# EAGLE board CT_schematic (EAGLE 7.6.0)

Size 100 x 80 mm. Coordinates in mm from the lower left corner, seen from the top.
Outline: 0,0 100,0 100,80 0,80 0,0
Copper layers (1*16): Top 0.035mm / dielectric 1.5mm / Bottom 0.035mm
Design rules "default": minimum track width 10mil, minimum drill 24mil, track to track 8mil, track to pad 8mil, pad to pad 8mil, via to via 8mil, smd to smd 8mil, copper to edge 40mil, drill to drill 8mil, minimum pad ring 10mil, minimum via ring 8mil, stop-mask expansion 4mil, vias tented up to drill 0mil, thermal gap 10mil

## Footprints (pad centres in the part's own frame; a part is rotated, then mirrored left to right if it is on the bottom)
C0603 = smd 0.8 x 0.8: 1 -0.762,0; 2 0.762,0
C0402 = smd 0.5 x 0.5: 1 -0.508,0; 2 0.508,0
C0805 = smd 1.2 x 1.3: 1 -1.016,0; 2 1.016,0
R0603 = smd 0.8 x 0.8: 1 -0.762,0; 2 0.762,0
C1210 = smd 1.2 x 2.5: 1 -1.524,0; 2 1.524,0
EXV-9H = smd 3.505 x 1.676: 1 -2.857,0; 2 2.857,0
L0603 = smd 0.8 x 0.8: 1 -0.762,0; 2 0.762,0
L1210 = smd 1.2 x 2.5: 1 -1.524,0; 2 1.524,0
PJ-037B_PACKAGE = drill 3.7 square: 1 12,0 | drill 3.2 square: 2 6,0
LQFP176 = smd 0.3 x 1.2: 1 -10.75,-12.75; 2 -10.25,-12.75; 3 -9.75,-12.75; 4 -9.25,-12.75; 5 -8.75,-12.75; 6 -8.25,-12.75; 7 -7.75,-12.75; 8 -7.25,-12.75; 9 -6.75,-12.75; 10 -6.25,-12.75; 11 -5.75,-12.75; 12 -5.25,-12.75; 13 -4.75,-12.75; 14 -4.25,-12.75; 15 -3.75,-12.75; 16 -3.25,-12.75; 17 -2.75,-12.75; 18 -2.25,-12.75; 19 -1.75,-12.75; 20 -1.25,-12.75; 21 -0.75,-12.75; 22 -0.25,-12.75; 23 0.25,-12.75; 24 0.75,-12.75; 25 1.25,-12.75; 26 1.75,-12.75; 27 2.25,-12.75; 28 2.75,-12.75; 29 3.25,-12.75; 30 3.75,-12.75; 31 4.25,-12.75; 32 4.75,-12.75; 33 5.25,-12.75; 34 5.75,-12.75; 35 6.25,-12.75; 36 6.75,-12.75; 37 7.25,-12.75; 38 7.75,-12.75; 39 8.25,-12.75; 40 8.75,-12.75; 41 9.25,-12.75; 42 9.75,-12.75; 43 10.25,-12.75; 44 10.75,-12.75; 89 10.75,12.75; 90 10.25,12.75; 91 9.75,12.75; 92 9.25,12.75; 93 8.75,12.75; 94 8.25,12.75; 95 7.75,12.75; 96 7.25,12.75; 97 6.75,12.75; 98 6.25,12.75; 99 5.75,12.75; 100 5.25,12.75; 101 4.75,12.75; 102 4.25,12.75; 103 3.75,12.75; 104 3.25,12.75; 105 2.75,12.75; 106 2.25,12.75; 107 1.75,12.75; 108 1.25,12.75; 109 0.75,12.75; 110 0.25,12.75; 111 -0.25,12.75; 112 -0.75,12.75; 113 -1.25,12.75; 114 -1.75,12.75; 115 -2.25,12.75; 116 -2.75,12.75; 117 -3.25,12.75; 118 -3.75,12.75; 119 -4.25,12.75; 120 -4.75,12.75; 121 -5.25,12.75; 122 -5.75,12.75; 123 -6.25,12.75; 124 -6.75,12.75; 125 -7.25,12.75; 126 -7.75,12.75; 127 -8.25,12.75; 128 -8.75,12.75; 129 -9.25,12.75; 130 -9.75,12.75; 131 -10.25,12.75; 132 -10.75,12.75 | smd 1.2 x 0.3: 45 12.75,-10.75; 46 12.75,-10.25; 47 12.75,-9.75; 48 12.75,-9.25; 49 12.75,-8.75; 50 12.75,-8.25; 51 12.75,-7.75; 52 12.75,-7.25; 53 12.75,-6.75; 54 12.75,-6.25; 55 12.75,-5.75; 56 12.75,-5.25; 57 12.75,-4.75; 58 12.75,-4.25; 59 12.75,-3.75; 60 12.75,-3.25; 61 12.75,-2.75; 62 12.75,-2.25; 63 12.75,-1.75; 64 12.75,-1.25; 65 12.75,-0.75; 66 12.75,-0.25; 67 12.75,0.25; 68 12.75,0.75; 69 12.75,1.25; 70 12.75,1.75; 71 12.75,2.25; 72 12.75,2.75; 73 12.75,3.25; 74 12.75,3.75; 75 12.75,4.25; 76 12.75,4.75; 77 12.75,5.25; 78 12.75,5.75; 79 12.75,6.25; 80 12.75,6.75; 81 12.75,7.25; 82 12.75,7.75; 83 12.75,8.25; 84 12.75,8.75; 85 12.75,9.25; 86 12.75,9.75; 87 12.75,10.25; 88 12.75,10.75; 133 -12.75,10.75; 134 -12.75,10.25; 135 -12.75,9.75; 136 -12.75,9.25; 137 -12.75,8.75; 138 -12.75,8.25; 139 -12.75,7.75; 140 -12.75,7.25; 141 -12.75,6.75; 142 -12.75,6.25; 143 -12.75,5.75; 144 -12.75,5.25; 145 -12.75,4.75; 146 -12.75,4.25; 147 -12.75,3.75; 148 -12.75,3.25; 149 -12.75,2.75; 150 -12.75,2.25; 151 -12.75,1.75; 152 -12.75,1.25; 153 -12.75,0.75; 154 -12.75,0.25; 155 -12.75,-0.25; 156 -12.75,-0.75; 157 -12.75,-1.25; 158 -12.75,-1.75; 159 -12.75,-2.25; 160 -12.75,-2.75; 161 -12.75,-3.25; 162 -12.75,-3.75; 163 -12.75,-4.25; 164 -12.75,-4.75; 165 -12.75,-5.25; 166 -12.75,-5.75; 167 -12.75,-6.25; 168 -12.75,-6.75; 169 -12.75,-7.25; 170 -12.75,-7.75; 171 -12.75,-8.25; 172 -12.75,-8.75; 173 -12.75,-9.25; 174 -12.75,-9.75; 175 -12.75,-10.25; 176 -12.75,-10.75
LGA14R35P5X6_200X200X100 = smd 0.35 x 0.15: 1 -0.8,0.525; 2 -0.8,0.175; 3 -0.8,-0.175; 4 -0.8,-0.525; 8 0.8,-0.525; 9 0.8,-0.175; 10 0.8,0.175; 11 0.8,0.525 | smd 0.15 x 0.35: 5 -0.35,-0.8; 6 0,-0.8; 7 0.35,-0.8; 12 0.35,0.8; 13 0,0.8; 14 -0.35,0.8
TST-110-05-T-D-RA = drill 1 pad 1.7 square: 1 0,0 | drill 1 pad 1.7: 2 0,2.54; 3 2.54,0; 4 2.54,2.54; 5 5.08,0; 6 5.08,2.54; 7 7.62,0; 8 7.62,2.54; 9 10.16,0; 10 10.16,2.54; 11 12.7,0; 12 12.7,2.54; 13 15.24,0; 14 15.24,2.54; 15 17.78,0; 16 17.78,2.54; 17 20.32,0; 18 20.32,2.54; 19 22.86,0; 20 22.86,2.54
SSOP-20 = smd 1.651 x 0.432: 1 -3.48,2.925; 2 -3.48,2.275; 3 -3.48,1.625; 4 -3.48,0.975; 5 -3.48,0.325; 6 -3.48,-0.325; 7 -3.48,-0.975; 8 -3.48,-1.625; 9 -3.48,-2.275; 10 -3.48,-2.925; 11 3.48,-2.925; 12 3.48,-2.275; 13 3.48,-1.625; 14 3.48,-0.975; 15 3.48,-0.325; 16 3.48,0.325; 17 3.48,0.975; 18 3.48,1.625; 19 3.48,2.275; 20 3.48,2.925
HTSS-105-01-G-D = drill 1 pad 1.8 square: 1 0,0 | drill 1 pad 1.8: 2 0,2.54; 3 2.54,0; 4 2.54,2.54; 5 5.08,0; 6 5.08,2.54; 7 7.62,0; 8 7.62,2.54; 9 10.16,0; 10 10.16,2.54
TDFN-8/6MM = smd 0.3 x 0.75: 1 0,0; 2 0.5,0; 3 1,0; 4 1.5,0; 5 1.5,3; 6 1,3; 7 0.5,3; 8 0,3
PC28F512P33BFD = smd 0.45 x 0.45: A1 0,0; A2 1,0; A3 2,0; A4 3,0; A5 4,0; A6 5,0; A7 6,0; A8 7,0; B1 0,-1; B2 1,-1; B3 2,-1; B4 3,-1; B5 4,-1; B6 5,-1; B7 6,-1; B8 7,-1; C1 0,-2; C2 1,-2; C3 2,-2; C4 3,-2; C5 4,-2; C6 5,-2; C7 6,-2; C8 7,-2; D1 0,-3; D2 1,-3; D3 2,-3; D4 3,-3; D5 4,-3; D6 5,-3; D7 6,-3; D8 7,-3; E1 0,-4; E2 1,-4; E3 2,-4; E4 3,-4; E5 4,-4; E6 5,-4; E7 6,-4; E8 7,-4; F1 0,-5; F2 1,-5; F3 2,-5; F4 3,-5; F5 4,-5; F6 5,-5; F7 6,-5; F8 7,-5; G1 0,-6; G2 1,-6; G3 2,-6; G4 3,-6; G5 4,-6; G6 5,-6; G7 6,-6; G8 7,-6; H1 0,-7; H2 1,-7; H3 2,-7; H4 3,-7; H5 4,-7; H6 5,-7; H7 6,-7; H8 7,-7
QFN-24 = smd 0.7 x 0.305: 1 -1.815,1.25; 2 -1.815,0.75; 3 -1.815,0.25; 4 -1.815,-0.25; 5 -1.815,-0.73; 6 -1.815,-1.25; 13 1.815,-1.25; 14 1.815,-0.75; 15 1.815,-0.25; 16 1.815,0.25; 17 1.815,0.75; 18 1.815,1.25 | smd 0.305 x 0.7: 7 -1.25,-1.815; 8 -0.75,-1.815; 9 -0.25,-1.815; 10 0.25,-1.815; 11 0.75,-1.815; 12 1.25,-1.815; 19 1.25,1.815; 20 0.75,1.815; 21 0.25,1.815; 22 -0.25,1.815; 23 -0.75,1.815; 24 -1.25,1.815 | smd 2.591 x 2.591: 25 0,0
USB-A-H = drill 0.914: 1 2.718,3.493; 2 2.718,1.003; 3 2.718,-1.003; 4 2.718,-3.493 | drill 2.311: 5 0,-6.566; 6 0,6.566
SOT143B = smd 1 x 0.7: 1 -0.75,-1 | smd 0.6 x 0.7: 2 0.95,-1; 3 0.95,1; 4 -0.95,1
SOT-23-6 = smd 1.1 x 0.6: 1 -1.4,0.95; 2 -1.4,0; 3 -1.4,-0.95; 4 1.4,-0.95; 5 1.4,0; 6 1.4,0.95
ABS07-32.768KHZ-7-T = smd 1.1 x 2.4: 1 -2.5,0; 2 0,0
ABLS-25.000MHZ-B2F-T = smd 5.6 x 2.8: 1 -3.81,0; 2 5.69,0
ASFL1 = smd 1.7 x 1.5: 1 -1.27,-1.1; 2 1.27,-1.1; 3 1.27,1.1; 4 -1.27,1.1
WSON-8 = smd 0.3 x 0.6: 1 -0.75,0; 2 0.05,0; 3 0.85,0; 4 1.65,0; 5 1.65,3.8; 6 0.85,3.8; 7 0.05,3.8; 8 -0.75,3.8 | smd 3 x 2.6: PAD 0.45,1.9
SON-6 = smd 0.55 x 0.3: 1 -0.355,0.5 | smd 0.52 x 0.3: 2 -0.37,0; 3 -0.37,-0.5; 4 0.37,-0.5; 5 0.37,0; 6 0.37,0.5
SW_4-1437565-2 = smd 1.4 x 2.1: 1 -2.23,4.55; 2 -2.23,-4.55; 3 2.23,4.55; 4 2.23,-4.55
LGM67K-G1J2-24-Z = smd 0.8 x 1.4: A -2,0; C 0,0
NC7SZ125M5X = smd 1.3 x 0.7: 1 -1.3,0.95; 2 -1.3,0; 3 -1.3,-0.95; 4 1.3,-0.95; 5 1.3,0.95

## Placement (x,y rotation side)
C1  1e-06  [C0603]  -49.53,78.74 0 top  (outside the outline)
C2  1e-07  [C0603]  -53.34,78.74 0 top  (outside the outline)
C3  1e-07  [C0603]  -57.15,78.74 0 top  (outside the outline)
C4  1e-07  [C0603]  -60.96,78.74 0 top  (outside the outline)
C5  1e-07  [C0603]  -64.77,78.74 0 top  (outside the outline)
C6  1e-07  [C0603]  -68.58,78.74 0 top  (outside the outline)
C7  1e-07  [C0603]  -72.39,78.74 0 top  (outside the outline)
C8  1e-07  [C0603]  -76.2,78.74 0 top  (outside the outline)
C9  1e-07  [C0603]  -80.01,78.74 0 top  (outside the outline)
C10  1e-07  [C0603]  -83.82,78.74 0 top  (outside the outline)
C11  1e-07  [C0603]  -87.63,78.74 0 top  (outside the outline)
C12  1e-07  [C0603]  -15.24,83.82 0 top  (outside the outline)
C13  1e-07  [C0603]  -19.05,83.82 0 top  (outside the outline)
C14  1e-07  [C0603]  -22.86,83.82 0 top  (outside the outline)
C15  1e-07  [C0603]  -26.67,83.82 0 top  (outside the outline)
C16  1e-07  [C0603]  -30.48,83.82 0 top  (outside the outline)
C17  1e-07  [C0603]  -34.29,83.82 0 top  (outside the outline)
C18  4.7e-06  [C0603]  -34.29,78.74 0 top  (outside the outline)
C19  2.2e-06  [C0603]  -38.1,78.74 0 top  (outside the outline)
C20  2.2e-06  [C0603]  -41.91,78.74 0 top  (outside the outline)
C21  1e-08  [C0603]  -38.1,83.82 0 top  (outside the outline)
C22  1e-06  [C0603]  -41.91,83.82 0 top  (outside the outline)
C23  1e-11  [C0402]  -45.72,88.9 0 top  (outside the outline)
C24  1e-11  [C0402]  -49.53,88.9 0 top  (outside the outline)
C25  1e-11  [C0402]  -53.34,88.9 0 top  (outside the outline)
C26  1e-11  [C0402]  -57.15,88.9 0 top  (outside the outline)
C27  1e-07  [C0402]  -60.96,88.9 0 top  (outside the outline)
C28  1e-07  [C0402]  -64.77,88.9 0 top  (outside the outline)
C29  1e-07  [C0402]  -68.58,88.9 0 top  (outside the outline)
C30  1e-06  [C0603]  -45.72,83.82 0 top  (outside the outline)
C31  1e-06  [C0603]  -49.53,83.82 0 top  (outside the outline)
C32  1e-06  [C0603]  -53.34,83.82 0 top  (outside the outline)
C33  4.7e-06  [C0805]  -72.39,67.31 0 top  (outside the outline)
C34  1e-08  [C0402]  -72.39,88.9 0 top  (outside the outline)
C35  1e-07  [C0402]  -76.2,88.9 0 top  (outside the outline)
C36  1e-08  [C0402]  -80.01,88.9 0 top  (outside the outline)
C37  1e-07  [C0402]  -83.82,88.9 0 top  (outside the outline)
C38  1e-08  [C0402]  -87.63,88.9 0 top  (outside the outline)
C39  1e-07  [C0402]  -15.24,93.98 0 top  (outside the outline)
C40  1e-08  [C0402]  -19.05,93.98 0 top  (outside the outline)
C41  1e-08  [C0402]  -22.86,93.98 0 top  (outside the outline)
C42  2.2e-06  [C0603]  -45.72,78.74 0 top  (outside the outline)
C43  1e-08  [C0402]  -26.67,93.98 0 top  (outside the outline)
C44  1e-08  [C0402]  -30.48,93.98 0 top  (outside the outline)
C45  0.0001  [R0603]  -57.15,83.82 0 top  (outside the outline)
C46  1e-08  [C0402]  -34.29,93.98 0 top  (outside the outline)
C47  8e-07  [R0603]  -60.96,83.82 0 top  (outside the outline)
C48  1e-05  [C0805]  -77.47,67.31 0 top  (outside the outline)
C49  1e-08  [C0402]  -38.1,93.98 0 top  (outside the outline)
C50  1e-05  [C1210]  -86.36,60.96 0 top  (outside the outline)
C51  1e-05  [C1210]  -16.51,67.31 0 top  (outside the outline)
C52  1e-08  [C0402]  -41.91,93.98 0 top  (outside the outline)
C53  1e-05  [C1210]  -22.86,67.31 0 top  (outside the outline)
C54  1e-05  [C1210]  -29.21,67.31 0 top  (outside the outline)
C55  1e-07  [C0402]  -45.72,93.98 0 top  (outside the outline)
C56  0.0001  [EXV-9H]  -54.61,53.34 0 top  (outside the outline)
C57  0.0001  [EXV-9H]  -66.04,53.34 0 top  (outside the outline)
C58  1e-08  [C0402]  -49.53,93.98 0 top  (outside the outline)
C59  1e-08  [C0402]  -53.34,93.98 0 top  (outside the outline)
C60  1e-08  [C0402]  -57.15,93.98 0 top  (outside the outline)
C61  1e-08  [C0402]  -60.96,93.98 0 top  (outside the outline)
F1  240.0  [L0603]  -64.77,83.82 0 top  (outside the outline)
I1  1.5e-05  [L1210]  -35.56,67.31 0 top  (outside the outline)
J1  PJ-037B  [PJ-037B_PACKAGE]  -72.39,7.62 0 top  (outside the outline)
R2  1000.0  [R0603]  -68.58,83.82 0 top  (outside the outline)
R4  4700.0  [R0603]  -72.39,83.82 0 top  (outside the outline)
R5  4700.0  [R0603]  -76.2,83.82 0 top  (outside the outline)
R6  4700.0  [R0603]  -80.01,83.82 0 top  (outside the outline)
R7  2200.0  [R0603]  -83.82,83.82 0 top  (outside the outline)
R8  2200.0  [R0603]  -87.63,83.82 0 top  (outside the outline)
R9  2200.0  [R0603]  -15.24,88.9 0 top  (outside the outline)
R10  2200.0  [R0603]  -19.05,88.9 0 top  (outside the outline)
R11  10000.0  [R0603]  -50.8,73.66 0 top  (outside the outline)
R12  10000.0  [R0603]  -55.88,73.66 0 top  (outside the outline)
R13  10000.0  [R0603]  -60.96,73.66 0 top  (outside the outline)
R14  100000.0  [R0603]  -82.55,67.31 0 top  (outside the outline)
R15  100000.0  [R0603]  -87.63,67.31 0 top  (outside the outline)
R16  100000.0  [R0603]  -15.24,73.66 0 top  (outside the outline)
R17  10000.0  [R0603]  -66.04,73.66 0 top  (outside the outline)
R18  10000.0  [R0603]  -71.12,73.66 0 top  (outside the outline)
R19  10000.0  [R0603]  -76.2,73.66 0 top  (outside the outline)
R20  10000.0  [R0603]  -81.28,73.66 0 top  (outside the outline)
R21  10000.0  [R0603]  -86.36,73.66 0 top  (outside the outline)
R22  47000.0  [R0603]  -15.24,78.74 0 top  (outside the outline)
R23  8060.0  [R0603]  -22.86,88.9 0 top  (outside the outline)
R24  100000.0  [R0603]  -20.32,73.66 0 top  (outside the outline)
R25  36000.0  [R0603]  -20.32,78.74 0 top  (outside the outline)
R26  100000.0  [R0603]  -25.4,73.66 0 top  (outside the outline)
R27  100000.0  [R0603]  -30.48,73.66 0 top  (outside the outline)
R28  2231.0  [R0603]  -26.67,88.9 0 top  (outside the outline)
R29  1000.0  [R0603]  -30.48,88.9 0 top  (outside the outline)
R30  100000.0  [R0603]  -35.56,73.66 0 top  (outside the outline)
R31  3900.0  [R0603]  -34.29,88.9 0 top  (outside the outline)
R32  1000.0  [R0603]  -38.1,88.9 0 top  (outside the outline)
R33  10000.0  [R0603]  -25.4,78.74 0 top  (outside the outline)
R34  10000.0  [R0603]  -30.48,78.74 0 top  (outside the outline)
R35  9100.0  [R0603]  -41.91,88.9 0 top  (outside the outline)
R36  680000.0  [R0603]  -40.64,73.66 0 top  (outside the outline)
R37  120000.0  [R0603]  -45.72,73.66 0 top  (outside the outline)
U1  STM32F207IGT6  [LQFP176]  -26.67,13.97 0 top  (outside the outline)
U2  BMC150  [LGA14R35P5X6_200X200X100]  -73.66,60.96 0 top  (outside the outline)
U3  TST-110-05-T-D-RA  [TST-110-05-T-D-RA]  -46.99,50.8 0 top  (outside the outline)
U4  MAX3218EAP+T  [SSOP-20]  -71.12,31.75 0 top  (outside the outline)
U5  HTSS-105-01-G-D  [HTSS-105-01-G-D]  -46.99,31.75 0 top  (outside the outline)
U6  24AA00T-I/MNY  [TDFN-8/6MM]  -62.23,31.75 0 top  (outside the outline)
U7  PC28F512P33BFD  [PC28F512P33BFD]  -88.9,10.16 0 top  (outside the outline)
U8  USB3317C-CP-TR  [QFN-24]  -78.74,60.96 0 top  (outside the outline)
U9  61400416021  [USB-A-H]  -46.99,8.89 0 top  (outside the outline)
U10  prtr5v0u2ax  [SOT143B]  -73.66,93.98 0 top  (outside the outline)
U11  MAX4995AAUT+T  [SOT-23-6]  -41.91,66.04 0 top  (outside the outline)
U12  ABS07-32.768KHZ-7-T  [ABS07-32.768KHZ-7-T]  -49.53,60.96 0 top  (outside the outline)
U13  ABLS-25.000MHZ-B2F-T  [ABLS-25.000MHZ-B2F-T]  -26.67,60.96 0 top  (outside the outline)
U14  ASFL1-26MHZ-NCS  [ASFL1]  -85.09,44.45 0 top  (outside the outline)
U15  LP2951ACSDX/NOPB  [WSON-8]  -68.58,43.18 0 top  (outside the outline)
U16  LP3878SDX-ADJ/NOPB  [WSON-8]  -30.48,43.18 0 top  (outside the outline)
U17  LP3878SDX-ADJ/NOPB  [WSON-8]  -50.8,43.18 0 top  (outside the outline)
U18  TPS3895ADRYR  [SON-6]  -77.47,92.71 0 top  (outside the outline)
U19  4-1437565-2  [SW_4-1437565-2]  -27.94,34.29 0 top  (outside the outline)
U20  Q65110A2395  [LGM67K-G1J2-24-Z]  -58.42,60.96 0 top  (outside the outline)
U21  nc7sz125m5x  [NC7SZ125M5X]  -46.99,67.31 0 top  (outside the outline)
U22  nc7sz125m5x  [NC7SZ125M5X]  -53.34,67.31 0 top  (outside the outline)
U23  nc7sz125m5x  [NC7SZ125M5X]  -59.69,67.31 0 top  (outside the outline)
U24  nc7sz125m5x  [NC7SZ125M5X]  -66.04,67.31 0 top  (outside the outline)

## Library data of the parts
C1-C61 F1 I1 J1 R2 R4-R37 U1-U24 = circuit_tree

## Nets
CLK_CRYSTAL_U1_9: C23.1 U1.9 U12.1
CLK_CRYSTAL_U1_10: C24.1 U1.10 U12.2
CLK_CRYSTAL_U1_29: C25.1 U1.29 U13.1
CLK_CRYSTAL_U1_30: C26.1 U1.30 U13.2
CLK_U8_23: U8.23 U14.3
GND: C1.2 C2.2 C3.2 C4.2 C5.2 C6.2 C7.2 C8.2 C9.2 C10.2 C11.2 C12.2 C13.2 C14.2 C15.2 C16.2 C17.2 C18.2 C19.2 C20.2 C21.2 C22.2 C23.2 C24.2 C25.2 C26.2 C27.2 C28.2 C29.2 C30.2 C31.2 C32.2 C34.2 C35.2 C36.2 C37.2 C38.2 C39.2 C40.2 C41.2 C42.2 C43.2 C44.2 C45.2 C46.2 C47.2 C48.2 C49.2 C50.2 C51.2 C52.2 C53.2 C54.2 C55.2 C56.2 C57.2 C58.2 C59.2 C60.2 C61.2 J1.2 R2.2 R11.2 R22.2 R23.2 R26.2 R29.2 R32.2 R35.2 R37.2 U1.14 U1.22 U1.37 U1.48 U1.61 U1.71 U1.90 U1.102 U1.113 U1.126 U1.135 U1.148 U1.158 U2.1 U2.6 U2.7 U2.9 U3.4 U3.6 U3.8 U3.10 U3.12 U3.14 U3.16 U3.18 U3.20 U4.5 U4.17 U4.20 U5.9 U6.4 U7.B2 U7.H2 U7.H4 U7.H6 U8.1 U8.25 U9.4 U9.5 U9.6 U10.1 U11.2 U14.2 U15.3 U15.4 U15.PAD U16.3 U16.PAD U17.3 U17.PAD U18.2 U20.C U21.2 U21.3 U22.1 U22.3 U23.1 U23.3 U24.1 U24.3
NET_U1_31: R5.1 U1.31 U23.4
NET_U1_39: C21.1 C22.1 F1.1 U1.38 U1.39
NET_U1_45: R9.1 U1.45 U6.6
NET_U1_46: R10.1 U1.46 U6.5
NET_U1_81: C19.1 U1.81
NET_U1_125: C20.1 U1.125
NET_U1_164: R7.1 U1.164 U2.11
NET_U1_166: R11.1 U1.166
NET_U1_168: R8.1 U1.168 U2.14
NET_U1_175: U20.A
NET_U1_176: U19.3 U19.4
NET_U4_1: I1.1 U4.1
NET_U4_2: R14.1 U4.2
NET_U4_3: R15.1 U4.3
NET_U4_4: R16.1 U4.4
NET_U4_15: C32.1 U4.15
NET_U4_16: C33.2 U4.16
NET_U4_18: C33.1 U4.18
NET_U4_19: C31.1 U4.19
NET_U5_3: U4.12 U5.3
NET_U5_4: U4.11 U5.4
NET_U5_5: U4.14 U5.5
NET_U5_6: U4.13 U5.6
NET_U7_A4: C39.1 C40.1 U7.A4
NET_U7_C6: R20.1 U7.C6
NET_U7_D4: R4.1 U7.D4 U22.4
NET_U8_4: C42.1 U8.4
NET_U8_22: R6.1 U8.22 U24.4
NET_U8_24: R23.1 U8.24
NET_U9_1: C45.1 U8.2 U9.1 U10.4 U11.1
NET_U9_2: U8.5 U9.2 U10.3
NET_U9_3: U8.6 U9.3 U10.2
NET_U11_3: R22.1 U11.3
NET_U11_4: U8.7 U11.4
NET_U15_5: R24.1 U15.5
NET_U15_7: R25.2 R26.1 U15.7
NET_U16_1: C49.1 U16.1
NET_U16_6: R28.2 R29.1 U16.6
NET_U16_8: R27.1 U16.8
NET_U17_1: C52.1 U17.1
NET_U17_6: R31.2 R32.1 U17.6
NET_U17_8: R30.1 U17.8
NET_U18_1: R34.1 R35.1 U18.1
NET_U18_3: R36.2 R37.1 U18.3
NET_U18_4: R33.1 U18.4 U21.4 U22.2 U23.2 U24.2
NET_U19_1: R2.1 U19.1 U19.2
PROC_FSMC_A0: U1.16 U7.A1
PROC_FSMC_A1: U1.17 U7.B1
PROC_FSMC_A2: U1.18 U7.C1
PROC_FSMC_A3: U1.19 U7.D1
PROC_FSMC_A4: U1.20 U7.D2
PROC_FSMC_A5: U1.21 U7.A2
PROC_FSMC_A6: U1.60 U7.C2
PROC_FSMC_A7: U1.63 U7.A3
PROC_FSMC_A8: U1.64 U7.B3
PROC_FSMC_A9: U1.65 U7.C3
PROC_FSMC_A10: U1.66 U7.D3
PROC_FSMC_A11: U1.67 U7.C4
PROC_FSMC_A12: U1.106 U7.A5
PROC_FSMC_A13: U1.107 U7.B5
PROC_FSMC_A14: U1.108 U7.C5
PROC_FSMC_A15: U1.109 U7.D7
PROC_FSMC_A16: U1.99 U7.D8
PROC_FSMC_A17: U1.100 U7.A7
PROC_FSMC_A18: U1.101 U7.B7
PROC_FSMC_A19: U1.2 U7.C7
PROC_FSMC_A20: U1.3 U7.C8
PROC_FSMC_A21: U1.4 U7.A8
PROC_FSMC_A22: U1.5 U7.G1
PROC_FSMC_A23: U1.1 U7.H8
PROC_FSMC_A24: U1.156 U7.B6
PROC_FSMC_CLK: U1.145 U7.E6
PROC_FSMC_D0: U1.104 U7.F2
PROC_FSMC_D1: U1.105 U7.E2
PROC_FSMC_D2: U1.142 U7.G3
PROC_FSMC_D3: U1.143 U7.E4
PROC_FSMC_D4: U1.68 U7.E5
PROC_FSMC_D5: U1.69 U7.G5
PROC_FSMC_D6: U1.70 U7.G6
PROC_FSMC_D7: U1.73 U7.H7
PROC_FSMC_D8: U1.74 U7.E1
PROC_FSMC_D9: U1.75 U7.E3
PROC_FSMC_D10: U1.76 U7.F3
PROC_FSMC_D11: U1.77 U7.F4
PROC_FSMC_D12: U1.78 U7.F5
PROC_FSMC_D13: U1.96 U7.H5
PROC_FSMC_D14: U1.97 U7.G7
PROC_FSMC_D15: U1.98 U7.E7
PROC_FSMC_NE4: R18.1 U1.155 U7.B4
PROC_FSMC_NL: R17.1 U1.165 U7.F6
PROC_FSMC_NOE: R19.1 U1.146 U7.F8
PROC_FSMC_NWAIT: U1.150 U7.F7
PROC_FSMC_NWE: R21.1 U1.147 U7.G8
PROC_SYS_JTCK_SWCLK: U1.137 U3.9
PROC_SYS_JTDO_SWO: U1.161 U3.13
PROC_SYS_JTMS_SWDIO: U1.124 U3.7
PROC_UART4_RX: U1.41 U4.9
PROC_UART4_TX: U1.40 U4.7
PROC_USB_OTG_HS_ULPI_CK: U1.51 U8.12
PROC_USB_OTG_HS_ULPI_D0: U1.47 U8.16
PROC_USB_OTG_HS_ULPI_D1: U1.56 U8.15
PROC_USB_OTG_HS_ULPI_D2: U1.57 U8.14
PROC_USB_OTG_HS_ULPI_D3: U1.79 U8.13
PROC_USB_OTG_HS_ULPI_D4: U1.80 U8.11
PROC_USB_OTG_HS_ULPI_D5: U1.92 U8.10
PROC_USB_OTG_HS_ULPI_D6: U1.93 U8.9
PROC_USB_OTG_HS_ULPI_D7: U1.163 U8.8
PROC_USB_OTG_HS_ULPI_DIR: U1.13 U8.19
PROC_USB_OTG_HS_ULPI_NXT: U1.35 U8.18
PROC_USB_OTG_HS_ULPI_STP: U1.32 U8.20
RST_OUT_U3_SRESET_B: R13.1 U3.15 U21.1
VCC_S1_13V0: C47.1 C50.1 C53.1 C56.1 C57.1 J1.1 R27.2 R30.2 U15.8 U16.4 U17.4
VCC_TIER1_1V8: C27.1 C44.1 C48.1 C58.1 C59.1 C60.1 C61.1 R24.2 R25.1 U2.8 U8.21 U15.1 U21.5 U22.5 U23.5 U24.5
VCC_TIER1_3V3: C1.1 C2.1 C3.1 C4.1 C5.1 C6.1 C7.1 C8.1 C9.1 C10.1 C11.1 C12.1 C13.1 C14.1 C15.1 C16.1 C17.1 C18.1 C28.1 C29.1 C30.1 C34.1 C35.1 C36.1 C37.1 C38.1 C41.1 C43.1 C46.1 C51.1 C55.1 F1.2 I1.2 R4.2 R5.2 R6.2 R7.2 R8.2 R9.2 R10.2 R12.1 R12.2 R13.2 R14.2 R15.2 R16.2 R17.2 R18.2 R19.2 R20.2 R21.2 R28.1 R33.2 R34.2 R36.1 U1.6 U1.15 U1.23 U1.36 U1.49 U1.62 U1.72 U1.82 U1.91 U1.103 U1.114 U1.127 U1.136 U1.149 U1.159 U1.172 U2.10 U2.12 U2.13 U3.1 U4.6 U6.8 U7.A6 U7.D5 U7.D6 U7.G4 U7.H3 U8.3 U8.17 U14.4 U16.5 U18.6
VCC_TIER1_5V0: C54.1 R31.1 U11.5 U17.5

## Tracks (layer width: path | path; a pad name or v marks a point on that pad's centre or on a via)
CLK_CRYSTAL_U1_9  (2 unrouted)
CLK_CRYSTAL_U1_10  (2 unrouted)
CLK_CRYSTAL_U1_29  (2 unrouted)
CLK_CRYSTAL_U1_30  (2 unrouted)
CLK_U8_23  (1 unrouted)
GND  (129 unrouted)
NET_U1_31  (2 unrouted)
NET_U1_39  (4 unrouted)
NET_U1_45  (2 unrouted)
NET_U1_46  (2 unrouted)
NET_U1_81  (1 unrouted)
NET_U1_125  (1 unrouted)
NET_U1_164  (2 unrouted)
NET_U1_166  (1 unrouted)
NET_U1_168  (2 unrouted)
NET_U1_176  (1 unrouted)
NET_U4_1  (1 unrouted)
NET_U4_2  (1 unrouted)
NET_U4_3  (1 unrouted)
NET_U4_4  (1 unrouted)
NET_U4_15  (1 unrouted)
NET_U4_16  (1 unrouted)
NET_U4_18  (1 unrouted)
NET_U4_19  (1 unrouted)
NET_U5_3  (1 unrouted)
NET_U5_4  (1 unrouted)
NET_U5_5  (1 unrouted)
NET_U5_6  (1 unrouted)
NET_U7_A4  (2 unrouted)
NET_U7_C6  (1 unrouted)
NET_U7_D4  (2 unrouted)
NET_U8_4  (1 unrouted)
NET_U8_22  (2 unrouted)
NET_U8_24  (1 unrouted)
NET_U9_1  (4 unrouted)
NET_U9_2  (2 unrouted)
NET_U9_3  (2 unrouted)
NET_U11_3  (1 unrouted)
NET_U11_4  (1 unrouted)
NET_U15_5  (1 unrouted)
NET_U15_7  (2 unrouted)
NET_U16_1  (1 unrouted)
NET_U16_6  (2 unrouted)
NET_U16_8  (1 unrouted)
NET_U17_1  (1 unrouted)
NET_U17_6  (2 unrouted)
NET_U17_8  (1 unrouted)
NET_U18_1  (2 unrouted)
NET_U18_3  (2 unrouted)
NET_U18_4  (5 unrouted)
NET_U19_1  (2 unrouted)
PROC_FSMC_A0  (1 unrouted)
PROC_FSMC_A1  (1 unrouted)
PROC_FSMC_A2  (1 unrouted)
PROC_FSMC_A3  (1 unrouted)
PROC_FSMC_A4  (1 unrouted)
PROC_FSMC_A5  (1 unrouted)
PROC_FSMC_A6  (1 unrouted)
PROC_FSMC_A7  (1 unrouted)
PROC_FSMC_A8  (1 unrouted)
PROC_FSMC_A9  (1 unrouted)
PROC_FSMC_A10  (1 unrouted)
PROC_FSMC_A11  (1 unrouted)
PROC_FSMC_A12  (1 unrouted)
PROC_FSMC_A13  (1 unrouted)
PROC_FSMC_A14  (1 unrouted)
PROC_FSMC_A15  (1 unrouted)
PROC_FSMC_A16  (1 unrouted)
PROC_FSMC_A17  (1 unrouted)
PROC_FSMC_A18  (1 unrouted)
PROC_FSMC_A19  (1 unrouted)
PROC_FSMC_A20  (1 unrouted)
PROC_FSMC_A21  (1 unrouted)
PROC_FSMC_A22  (1 unrouted)
PROC_FSMC_A23  (1 unrouted)
PROC_FSMC_A24  (1 unrouted)
PROC_FSMC_CLK  (1 unrouted)
PROC_FSMC_D0  (1 unrouted)
PROC_FSMC_D1  (1 unrouted)
PROC_FSMC_D2  (1 unrouted)
PROC_FSMC_D3  (1 unrouted)
PROC_FSMC_D4  (1 unrouted)
PROC_FSMC_D5  (1 unrouted)
PROC_FSMC_D6  (1 unrouted)
PROC_FSMC_D7  (1 unrouted)
PROC_FSMC_D8  (1 unrouted)
PROC_FSMC_D9  (1 unrouted)
PROC_FSMC_D10  (1 unrouted)
PROC_FSMC_D11  (1 unrouted)
PROC_FSMC_D12  (1 unrouted)
PROC_FSMC_D13  (1 unrouted)
PROC_FSMC_D14  (1 unrouted)
PROC_FSMC_D15  (1 unrouted)
PROC_FSMC_NE4  (2 unrouted)
PROC_FSMC_NL  (2 unrouted)
PROC_FSMC_NOE  (2 unrouted)
PROC_FSMC_NWAIT  (1 unrouted)
PROC_FSMC_NWE  (2 unrouted)
PROC_SYS_JTCK_SWCLK  (1 unrouted)
PROC_SYS_JTDO_SWO  (1 unrouted)
PROC_SYS_JTMS_SWDIO  (1 unrouted)
PROC_UART4_RX  (1 unrouted)
PROC_UART4_TX  (1 unrouted)
PROC_USB_OTG_HS_ULPI_CK  (1 unrouted)
PROC_USB_OTG_HS_ULPI_D0  (1 unrouted)
PROC_USB_OTG_HS_ULPI_D1  (1 unrouted)
PROC_USB_OTG_HS_ULPI_D2  (1 unrouted)
PROC_USB_OTG_HS_ULPI_D3  (1 unrouted)
PROC_USB_OTG_HS_ULPI_D4  (1 unrouted)
PROC_USB_OTG_HS_ULPI_D5  (1 unrouted)
PROC_USB_OTG_HS_ULPI_D6  (1 unrouted)
PROC_USB_OTG_HS_ULPI_D7  (1 unrouted)
PROC_USB_OTG_HS_ULPI_DIR  (1 unrouted)
PROC_USB_OTG_HS_ULPI_NXT  (1 unrouted)
PROC_USB_OTG_HS_ULPI_STP  (1 unrouted)
RST_OUT_U3_SRESET_B  (2 unrouted)
VCC_S1_13V0  (10 unrouted)
VCC_TIER1_1V8  (15 unrouted)
VCC_TIER1_3V3  (86 unrouted)
VCC_TIER1_5V0  (3 unrouted)